# Altium PCB RTTester.PcbDoc (part 1 of 2)
Units mil, origin at the board's own origin, x right, y up, seen from the top; angles counter-clockwise.
Board outline 3930 x 3920 mil, 2 copper layers (Top Layer, Bottom Layer); 146 components, 202 nets, 779 pads, 204 vias.
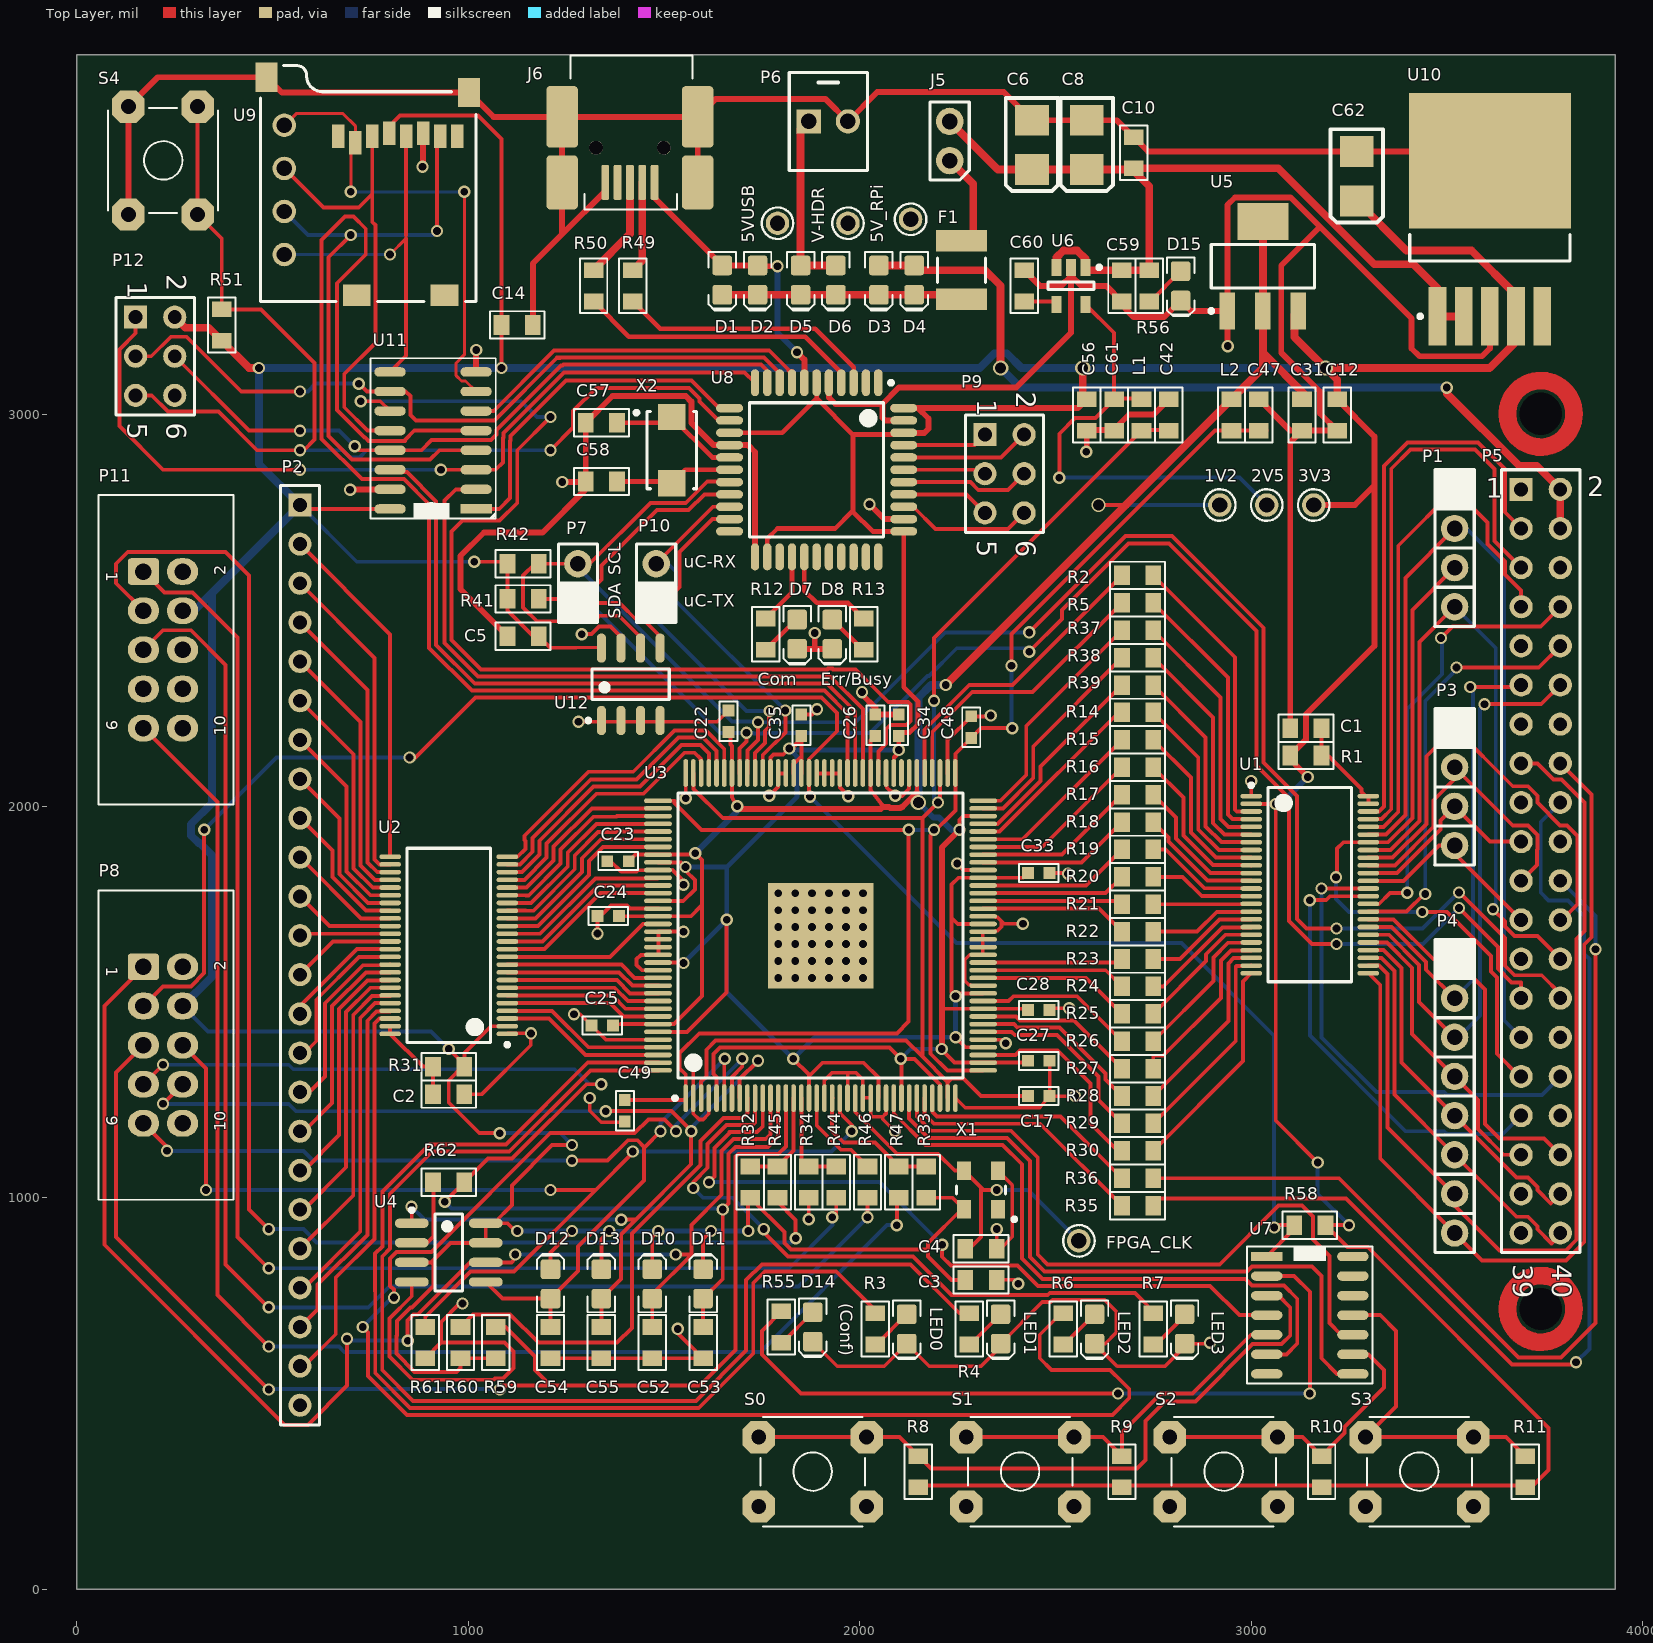
[diagram p0: Top Layer view]
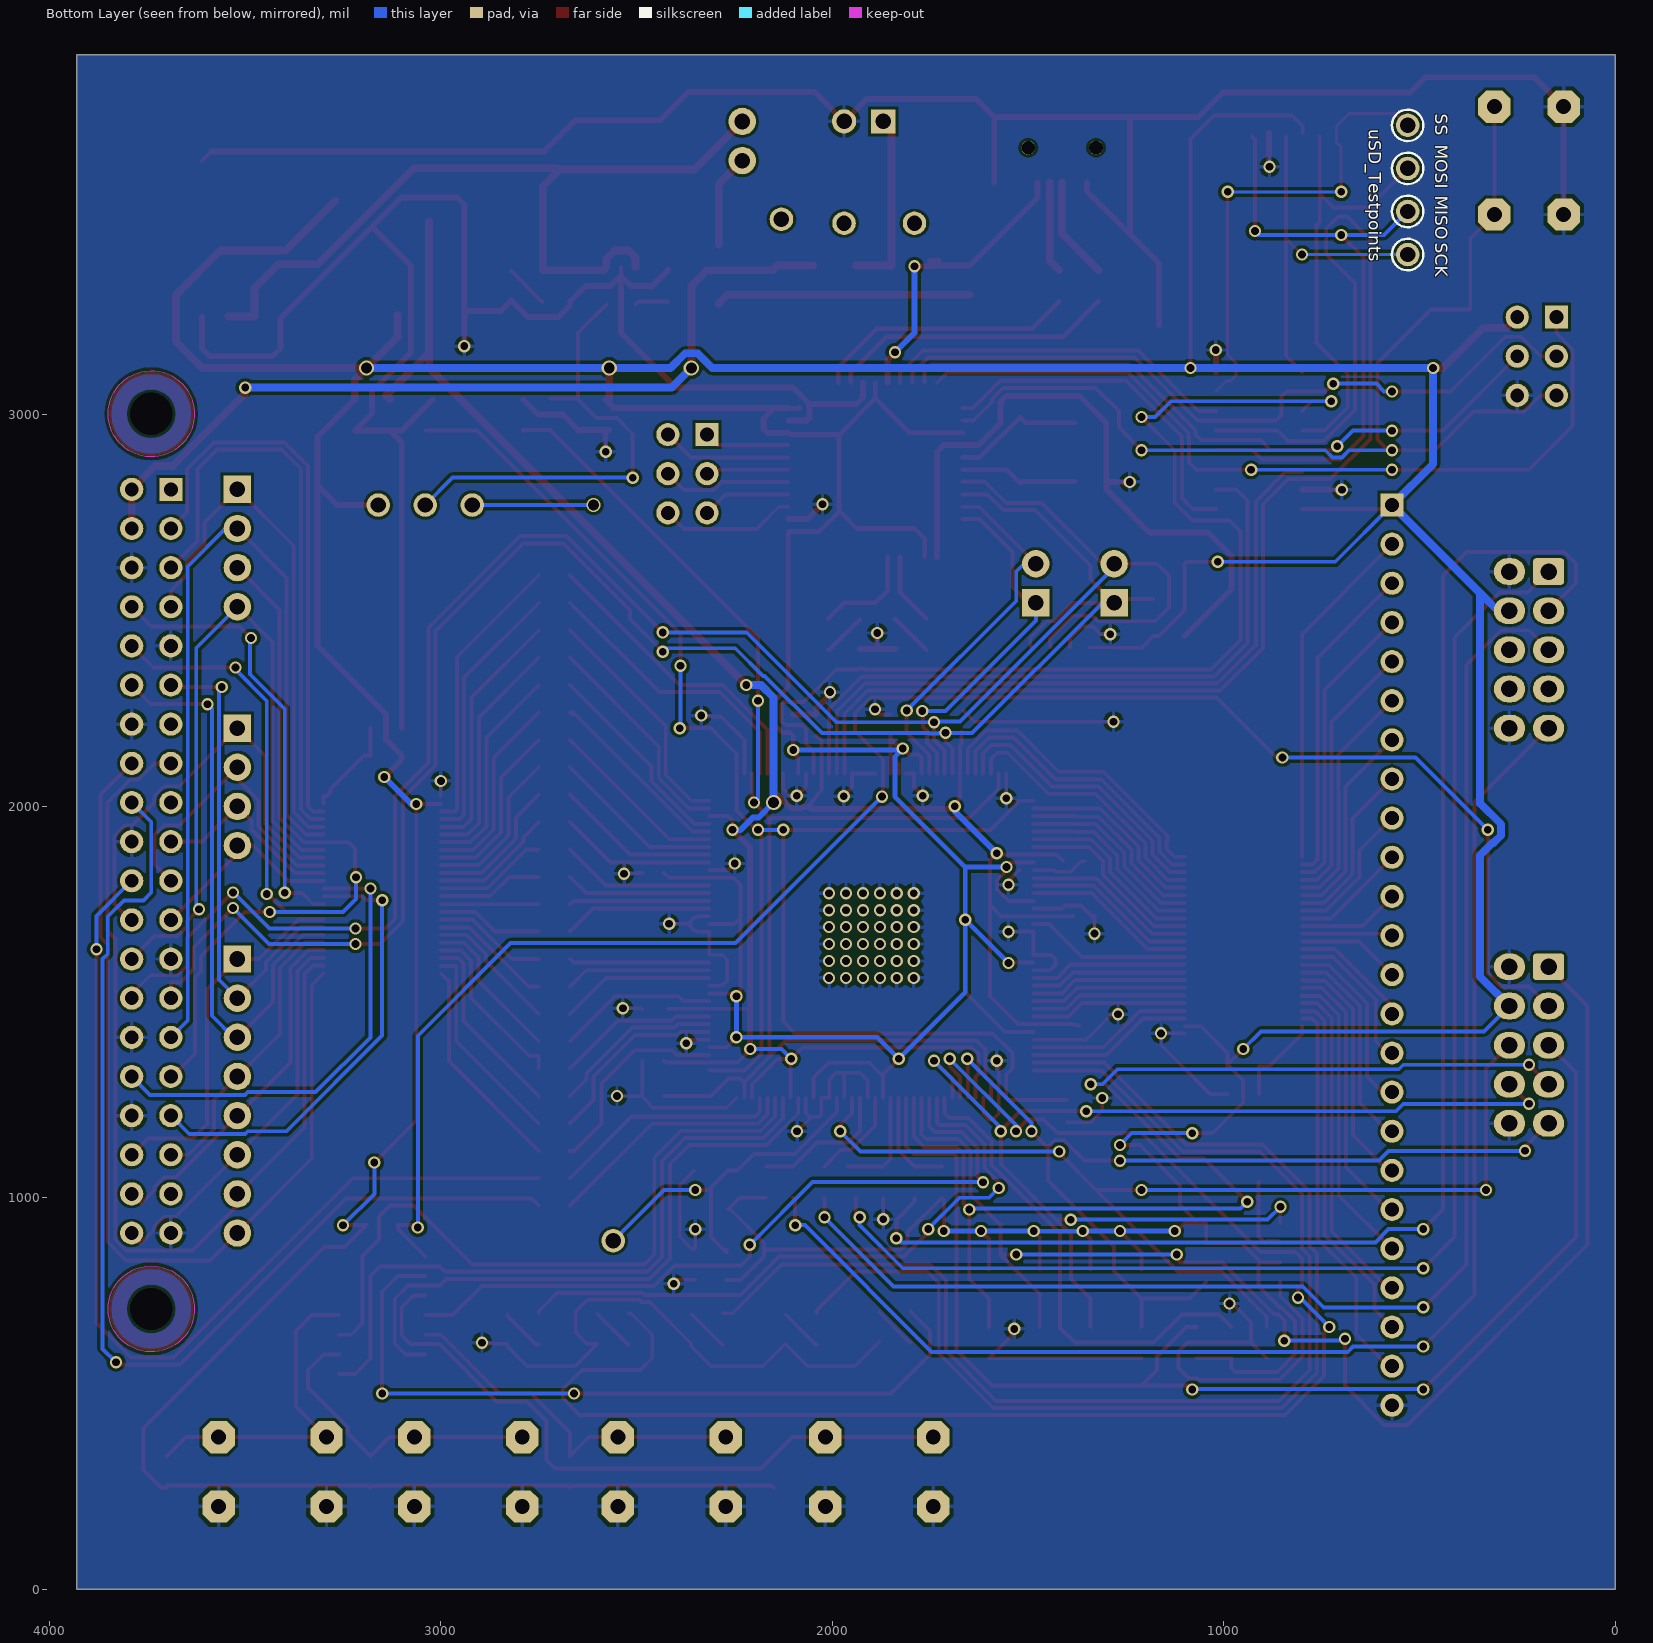
[diagram p1: Bottom Layer view, seen from below]

## Layer stack, top to bottom
Top Solder: solder mask 0.4, Solder Resist, Dk 3.5
Top Layer: signal copper 1.4
Dielectric 1: dielectric 12.6, FR-4, Dk 4.8
Bottom Layer: signal copper 1.4
Bottom Solder: solder mask 0.4, Solder Resist, Dk 3.5

## Board outline
0,0 3930,0 3930,3920 0,3920

## Design rules (kind name [scope] priority, off if disabled: settings)
AssemblyTestpoint [All] p1: testpointundercomponent=FALSE minsize=40 maxsize=100 preferedsize=60 minholesize=0 maxholesize=40 preferedholesize=32 testpointgrid=1 usegrid=FALSE gridtolerance=0.01 allowsidetop=TRUE allowsidebottom=TRUE
Clearance Pad_Clearance [(InPadClass('All Pads'))] p1: gap=7
Clearance [All] p2: gap=8
FabricationTestpoint [All] p1: side=3 testpointundercomponent=FALSE minsize=40 maxsize=100 preferedsize=60 minholesize=0 maxholesize=40 preferedholesize=32 testpointgrid=1 allowsidetop=TRUE allowsidebottom=TRUE usegrid=FALSE gridtolerance=0.01
HoleSize [All] p1: absolutevalues=TRUE maxlimit=150 minlimit=11.81 maxpercent=80.000 minpercent=20.000
PolygonConnect [All] p1: connectstyle=Relief reliefconductorwidth=10 reliefentries=4 polygonreliefangle="90 Angle" airgapwidth=10
RoutingVias [All] p1: holewidth=19.68 width=31.5 viastyle="Through Hole" minholewidth=15.75 minwidth=27.56 maxholewidth=27.56 maxwidth=35.43
SMDNeckDown [All] p1: percent=105.000
SolderMaskExpansion [All] p1: expansion=4
Width [All] p1: maxlimit=4000 minlimit=8 preferedwidth=10
27 further rules are at their usual default settings.

## Classes and differential pairs
net class SW[0..3]: SW0 SW1 SW2 SW3
net class LED[0..3]: LED0 LED1 LED2 LED3
net class FPGAIO_B[0..21]: FPGAIO_B0 FPGAIO_B1 FPGAIO_B2 FPGAIO_B3 FPGAIO_B4 FPGAIO_B5 FPGAIO_B6 FPGAIO_B7 FPGAIO_B8 FPGAIO_B9 FPGAIO_B10 FPGAIO_B11 FPGAIO_B12 FPGAIO_B13 FPGAIO_B14 FPGAIO_B15 FPGAIO_B16 FPGAIO_B17 FPGAIO_B18 FPGAIO_B19 FPGAIO_B20 FPGAIO_B21
net class FPGAIO_A[2..27]: FPGAIO_A2 FPGAIO_A3 FPGAIO_A4 FPGAIO_A5 FPGAIO_A6 FPGAIO_A7 FPGAIO_A8 FPGAIO_A9 FPGAIO_A10 FPGAIO_A11 FPGAIO_A12 FPGAIO_A13 FPGAIO_A14 FPGAIO_A15 FPGAIO_A16 FPGAIO_A17 FPGAIO_A18 FPGAIO_A19 FPGAIO_A20 FPGAIO_A21 FPGAIO_A22 FPGAIO_A23 FPGAIO_A24 FPGAIO_A25
component class U_PUS_Decoupling: C6 C8 C17 C22 C23 C24 C25 C26 C27 C28 C33 C34 C35 C42 C47 C48 C49 L1 L2
component class U_PSU: D1 D2 D3 D4 D5 D6 F1 J5
component class U_PSU_3V3_LD29300: C10 C62 U10
component class U_PSU_2V5_LDK130: C59 C60 C61 U6
component class U_PSU_1V2_LD1117A: C12 C31 U5
component class U_OSC: C3 C4 X1
component class U_MicroSD: U9
component class U_MCU_USB_Interface: C56 C57 C58 D7 D8 P9 P10 P12 R12 R13 R49 R50 R51 S4 U8 X2
component class U_LEDs_Switches: D14 D15 LED0 LED1 LED2 LED3 R3 R4 R6 R7 R8 R9 R10 R11 R55 R56 S0 S1 S2 S3 U7
component class U_FPGA_Conf: R58 R59 R60 R61 R62 U4
component class U_FPGA_Banks: U3
component class U_Connectors: C1 C2 C14 J6 P1 P2 P3 P4 P5 P6 P7 R1 R2 R5 R14 R15 R16 R17 R18 R19 R20 R21 R22 R23 R24 R25 R26 R27 R28 R29 R30 R31 R35 R36 R37 R38 R39 R41 R42 U1 U2 U11
component class U_Config_Interfaces: C52 C53 C54 C55 D10 D11 D12 D13 P8 P11 R32 R33 R34 R44 R45 R46 R47
component class U_EEPROM: C5 U12

## Components (designator, comment, footprint, x,y, rotation, side; value= is the part's Value field where it differs from the comment)
C1 "10pF" 0805C-GENERIC 3170,2200 r180 top
C2 "10pF" 0805C-GENERIC 920,1265 r0 top
C3 "0.1uF" 0805C-GENERIC 2280,790 r0 top
C4 "15pF" 0805C-GENERIC 2280,870 r0 top
C5 "100nF" 0805C-GENERIC 1170,2435 r180 top
C6 "10uF" AVX-CAPC3528_V 2440,3690 r90 top
C8 "10uF" AVX-CAPC3528_V 2580,3690 r90 top
C10 "0.47uF" 0805C-GENERIC 2700,3640 r90 top
C12 "0.1uF" 0805C-GENERIC 3220,3030 r270 top
C14 "100nF" 0805C-GENERIC 1095,3230 r0 top
C17 "10nF" 0603C-GENERIC 2485,1260 r180 top
C22 "4.7nF" 0603C-GENERIC 1665,2190 r90 top
C23 "4.7nF" 0603C-GENERIC 1410,1860 r180 top
C24 "10nF" 0603C-GENERIC 1385,1720 r180 top
C25 "22nF" 0603C-GENERIC 1370,1440 r180 top
C26 "0.1uF" 0603C-GENERIC 2040,2180 r90 top
C27 "0.47uF" 0603C-GENERIC 2430,1350 r0 top
C28 "10uF" 0603C-GENERIC 2430,1480 r0 top
C31 "10uF" 0805C-GENERIC 3130,3030 r270 top
C33 "4.7nF" 0603C-GENERIC 2430,1830 r0 top
C34 "22nF" 0603C-GENERIC 2100,2180 r90 top
C35 "1uF" 0603C-GENERIC 1850.79,2180 r90 top
C42 "10uF" 0805C-GENERIC 2790,3030 r270 top
C47 "10uF" 0805C-GENERIC 3020,3030 r270 top
C48 "2.2nF" 0603C-GENERIC 2285,2175 r90 top
C49 "0.22uF" 0603C-GENERIC 1400,1250 r270 top
C52 "10pF" 0805C-GENERIC 1470,660 r270 top
C53 "10pF" 0805C-GENERIC 1600,660 r270 top
C54 "10pF" 0805C-GENERIC 1210,660 r270 top
C55 "10pF" 0805C-GENERIC 1340,660 r270 top
C56 "1uF" 0805C-GENERIC 2580,2970 r90 top
C57 "12pF" 0805C-GENERIC 1310,2980 r0 top
C58 "12pF" 0805C-GENERIC 1310,2830 r0 top
C59 "1uF" 0805C-GENERIC 2670,3360 r270 top
C60 "10nF" 0805C-GENERIC 2420,3300 r90 top
C61 "1uF" 0805C-GENERIC 2650,3030 r270 top locked
C62 "10uF" AVX-CAPC3528_V 3270,3610 r90 top
D1 "D Schottky" LED-0805-K 1649,3344.5 r270 top
D2 "D Schottky" LED-0805-K 1739,3344.5 r270 top
D3 "D Schottky" LED-0805-K 2049,3344.5 r270 top
D4 "D Schottky" LED-0805-K 2139,3344.5 r270 top
D5 "D Schottky" LED-0805-K 1849,3344.5 r270 top
D6 "D Schottky" LED-0805-K 1939,3344.5 r270 top
D7 "LEDG" LED-0805-K 1840,2440 r270 top
D8 "LEDY" LED-0805-K 1930,2440 r270 top
D10 "D Schottky" LED-0805-K 1470,780 r90 top
D11 "D Schottky" LED-0805-K 1600,780 r90 top
D12 "D Schottky" LED-0805-K 1210,780 r90 top
D13 "D Schottky" LED-0805-K 1340,780 r90 top
D14 "LEDY" LED-0805-K 1880,670 r270 top
D15 "LEDG" LED-0805-K 2820,3330 r270 top
F1 "Polyfuse_1812L200THPR" 1812 2260,3370 r90 top
J5 "JMPR2" JMPR2-CLOSED 2230,3650 r180 top
J6 "USB_Mini-B" USB_Mini-B_Molex_SMT 1218,3919 r270 top
L1 "1K at 100MHz 300mA Bead" 0805FB-1KZ 2720,3030 r270 top
L2 "1K at 100MHz 300mA Bead" 0805FB-1KZ 2950,3030 r270 top locked
LED0 "LEDB" LED-0805-K 2120,665 r270 top
LED1 "LEDB" LED-0805-K 2360,665 r270 top
LED2 "LEDB" LED-0805-K 2600,665 r270 top
LED3 "LEDB" LED-0805-K 2830,665 r270 top
P1 "Header 4" HEADER-1X4 3520,2810 r0 top
P2 "Header 24" HDR1X24 570,2770 r270 top
P3 "Header 4" HEADER-1X4 3520,2200 r0 top
P4 "Header 8" HEADER-1X8 3520,1610 r0 top
P5 "Header 20X2" HDR2X20 3690,2810 r270 top
P6 "Header 2" "Connector Molex 2" 1870,3750 r0 top
P7 "Header 2" HEADER-1X2 1280,2520 r180 top
P8 "Header 5X2" 10P_PCB_HEADER_BRD_MNT 220,1390 r0 top
P9 "Header 3X2" HDR2X3 2320,2950 r270 top
P10 "Header 2" HEADER-1X2 1480,2520 r180 top
P11 "Header 5X2" 10P_PCB_HEADER_BRD_MNT 220,2400 r0 top
P12 "Header 3X2" HDR2X3 150,3250 r270 top locked
R1 "200k" 0805R-220K 3170,2130 r180 top
R2 "270" 0805R-270 2680,2590 r0 top
R3 "270" 0805R-270 2040,635 r90 top
R4 "270" 0805R-270 2280,635 r90 top
R5 "270" 0805R-270 2680,2520 r0 top
R6 "270" 0805R-270 2520,635 r90 top
R7 "270" 0805R-270 2750,635 r90 top
R8 "10k" 0805R-10K 2150,340 r270 top
R9 "10k" 0805R-10K 2670,340 r270 top
R10 "10k" 0805R-10K 3180,340 r270 top
R11 "10k" 0805R-10K 3700,340 r270 top
R12 "270" 0805R-270 1760,2410 r90 top
R13 "270" 0805R-270 2010,2410 r90 top
R14 "270" 0805R-270 2680,2240 r0 top
R15 "270" 0805R-270 2680,2170 r0 top
R16 "270" 0805R-270 2680,2100 r0 top
R17 "270" 0805R-270 2680,2030 r0 top
R18 "270" 0805R-270 2680,1960 r0 top
R19 "270" 0805R-270 2680,1890 r0 top
R20 "270" 0805R-270 2680,1820 r0 top
R21 "270" 0805R-270 2680,1750 r0 top
R22 "270" 0805R-270 2680,1680 r0 top
R23 "270" 0805R-270 2680,1610 r0 top
R24 "270" 0805R-270 2680,1540 r0 top
R25 "270" 0805R-270 2680,1470 r0 top
R26 "270" 0805R-270 2680,1400 r0 top
R27 "270" 0805R-270 2680,1330 r0 top
R28 "270" 0805R-270 2680,1260 r0 top
R29 "270" 0805R-270 2680,1190 r0 top
R30 "270" 0805R-270 2680,1120 r0 top
R31 "200k" 0805R-220K 920,1335 r0 top
R32 "10k" 0805R-10K 1720,1000 r90 top
R33 "10k" 0805R-10K 2170,1000 r90 top
R34 "1k" 0805R-1K 1870,1070 r270 top
R35 "270" 0805R-270 2680,980 r0 top
R36 "270" 0805R-270 2680,1050 r0 top
R37 "270" 0805R-270 2680,2450 r0 top
R38 "270" 0805R-270 2680,2380 r0 top
R39 "270" 0805R-270 2680,2310 r0 top
R41 "2.2k" 0805R-0R1 1110,2530 r0 top
R42 "2.2k" 0805R-0R1 1110,2620 r0 top
R44 "100" 0805R-100 1940,1070 r270 top
R45 "100" 0805R-100 1790,1070 r270 top
R46 "100" 0805R-100 2020,1070 r270 top
R47 "100" 0805R-100 2100,1070 r270 top
R49 "22" 0805R-22 1420,3360 r270 top
R50 "22" 0805R-22 1320,3360 r270 top
R51 "10k" 0805R-10K 370,3270 r270 top
R55 "270" 0805R-270 1800,640 r90 top
R56 "270" 0805R-270 2740,3300 r90 top
R58 "10k" 0805R-10K 3190,930 r180 top
R59 "10k" 0805R-10K 1070,590 r90 top
R60 "10k" 0805R-10K 980,590 r90 top locked
R61 "10k" 0805R-10K 890,670 r270 top
R62 "25" 0805R-0R1 920,1040 r0 top
S0 "EVQ-PQHB55" TACT-SWITCH-TS1150 1880,300 r0 top
S1 "EVQ-PQHB55" TACT-SWITCH-TS1150 2410,300 r0 top
S2 "EVQ-PQHB55" TACT-SWITCH-TS1150 2930,300 r0 top
S3 "EVQ-PQHB55" TACT-SWITCH-TS1150 3430,300 r0 top
S4 "EVQ-PQHB55" TACT-SWITCH-TS1150 220,3650 r270 top
U1 "GTL2000" TSSOP50P810X120-48N 3150,1800 r0 top
U2 "GTL2000" TSSOP50P810X120-48N 950,1645 r180 top
U3 "EP4CE15E22C8N" EQFP144_A-165_D2-67_N 1900,1670 r90 top
U4 "EPCS16SI8N" SOIC8_N 950,860 r0 top
U5 "LD1117AS12TR" SOT-223_N 3030,3380 r90 top
U6 "LDK130M25R" SOT23-5L_N 2540,3330 r270 top
U7 "74HC7014" SO14 3040,850 r0 top
U8 "ATmega32U4-AU" 44ML_N 1890,2860 r270 top
U9 "microSD Socket" MICRO-SD-SOCKET-PP 1020,3290 r0 top
U10 "LD29300P2M33R" P2PAK/A_N 3610,3500 r90 top
U11 "ADG3257BRQ" SO16 1020,2760 r180 top
U12 "24LC256-I/SN" SOIC-SN8_L 1415,2312 r90 top
X1 "VCC1-B3B-50M0000000" HOSC-L500HW320H105-4_2 2310,1020 r90 top
X2 "4SMX" 4SMX 1520,2910 r270 top (schematic designator Y1)

## Footprints (in the part's own frame and the unit in brackets; to place one, negate y for a bottom-side part, rotate by r counter-clockwise, add the part's x,y. Pads: shape width x height; smd on the part's side, far side on the other; paste and mask are expansions set on the pad)
4SMX [mm] "Surface Mount Quartz Crystal; Body 5.2 x 3.4 mm (LxW max)"
  rect 1.7x1.8 smd: 1(-2.15,0) 2(2.15,0)
  silkscreen extent -2.57,-2.42 2.5,1.6
10P_PCB_HEADER_BRD_MNT [mil] "HEADER BRD MNT 10POS 2.54MM"
  round 40 on Mech15: 0(0,0)
  rrect25% 80x68 hole 42: 1(-50,200)
  oval 80x68 hole 42: 2(50,200) 3(-50,100) 4(50,100) 5(-50,0) 6(50,0) 7(-50,-100) 8(50,-100) 9(-50,-200) 10(50,-200)
  silkscreen extent -165,-395 180,395, body extent -162,-394 178,394, height 390
44ML_N [mm] "Thin QFP, 44-Leads, Body 10x10mm, Pitch 0.8mm, IPC Medium Density"
  oval 1.75x0.55 smd: 1(-5.65,4) 2(-5.65,3.2) 3(-5.65,2.4) 4(-5.65,1.6) 5(-5.65,0.8) 6(-5.65,0) 7(-5.65,-0.8) 8(-5.65,-1.6) 9(-5.65,-2.4) 10(-5.65,-3.2) 11(-5.65,-4) 23(5.65,-4) 24(5.65,-3.2) 25(5.65,-2.4) 26(5.65,-1.6) 27(5.65,-0.8) 28(5.65,0) 29(5.65,0.8) 30(5.65,1.6) 31(5.65,2.4) 32(5.65,3.2) 33(5.65,4)
  oval 0.55x1.75 smd: 12(-4,-5.65) 13(-3.2,-5.65) 14(-2.4,-5.65) 15(-1.6,-5.65) 16(-0.8,-5.65) 17(0,-5.65) 18(0.8,-5.65) 19(1.6,-5.65) 20(2.4,-5.65) 21(3.2,-5.65) 22(4,-5.65) 34(4,5.65) 35(3.2,5.65) 36(2.4,5.65) 37(1.6,5.65) 38(0.8,5.65) 39(0,5.65) 40(-0.8,5.65) 41(-1.6,5.65) 42(-2.4,5.65) 43(-3.2,5.65) 44(-4,5.65)
  silkscreen extent -5.77,-4.35 4.35,4.95, body extent -5,-5 5,5, height 1.2
0603C-GENERIC [mil] "CAPACITOR 0603"
  rect 30x30 smd: 1(0,0) 2(55,0)
  silkscreen extent -23,-23 78,23, body extent -4,-15 59,15, height 19
0805C-GENERIC [mil] "CAPACITOR 0805"
  rect 40x50 smd: 1(-10,0) 2(70,0)
  silkscreen extent -40,-35 100,35, body extent -11,-25 70,25, height 26
0805FB-1KZ [mil] "FERRITE BEAD 0805"
  rect 40x50 smd: 1(-10,0) 2(70,0)
  silkscreen extent -40,-35 100,35, body extent -11,-25 70,25, height 26
0805R-0R1 [mil] "RESISTOR 0805"
  rect 40x50 smd: 1(-10,0) 2(70,0)
  silkscreen extent -40,-35 100,35, body extent -11,-25 70,25, height 27
0805R-1K [mil] "RESISTOR 0805"
  rect 40x50 smd: 1(-10,0) 2(70,0)
  silkscreen extent -40,-35 100,35, body extent -11,-25 70,25, height 27
0805R-10K [mil] "RESISTOR 0805"
  rect 40x50 smd: 1(0,0) 2(80,0)
  silkscreen extent -30,-35 110,35, body extent -1,-25 80,25, height 27
0805R-22 [mil] "RESISTOR 0805"
  rect 40x50 smd: 1(-10,0) 2(70,0)
  silkscreen extent -40,-35 100,35, body extent -11,-25 70,25, height 27
0805R-100 [mil] "RESISTOR 0805"
  rect 40x50 smd: 1(-10,0) 2(70,0)
  silkscreen extent -40,-35 100,35, body extent -11,-25 70,25, height 27
0805R-220K [mil] "RESISTOR 0805"
  rect 40x50 smd: 1(-10,0) 2(70,0)
  silkscreen extent -40,-35 100,35, body extent -11,-25 70,25, height 27
0805R-270 [mil] "RESISTOR 0805"
  rect 40x50 smd: 1(-10,0) 2(70,0)
  silkscreen extent -40,-35 100,35, body extent -11,-25 70,25, height 27
1812 [mm] "Chip Capacitor, Body 4.5x3.2mm, IPC High Density"
  rect 1.4x3.3 smd: 1(-1.9,0) 2(1.9,0)
  silkscreen extent -0.8,-1.55 0.8,1.55, body extent -2.4,-1.7 2.4,1.7, height 1.4
AVX-CAPC3528_V [mm]
  rect 2x2.2 smd: 1(-1.6,0) 2(1.6,0)
  silkscreen extent -3,-1.7 3.05,1.7, body extent -1.79,-1.54 1.8,1.54, height 1.9
"Connector Molex 2" [mil]
  rect 62x62 hole 39.4: 1(0,0)
  round 62 hole 39.4: 2(100,0)
  silkscreen extent -50,-125 150,125
EQFP144_A-165_D2-67_N [mm] "Shrink QFP, 144-Leads, Body 20x20mm, Pitch 0.5mm, Thermal Pad 6.85x6.85mm, IPC Medium Density"
  oval 1.8x0.3 smd: 1(-10.55,8.75) 2(-10.55,8.25) 3(-10.55,7.75) 4(-10.55,7.25) 5(-10.55,6.75) 6(-10.55,6.25) 7(-10.55,5.75) 8(-10.55,5.25) 9(-10.55,4.75) 10(-10.55,4.25) 11(-10.55,3.75) 12(-10.55,3.25) 13(-10.55,2.75) 14(-10.55,2.25) 15(-10.55,1.75) 16(-10.55,1.25) 17(-10.55,0.75) 18(-10.55,0.25) 19(-10.55,-0.25) 20(-10.55,-0.75) 21(-10.55,-1.25) 22(-10.55,-1.75) 23(-10.55,-2.25) 24(-10.55,-2.75) 25(-10.55,-3.25) 26(-10.55,-3.75) 27(-10.55,-4.25) 28(-10.55,-4.75) 29(-10.55,-5.25) 30(-10.55,-5.75) 31(-10.55,-6.25) 32(-10.55,-6.75) 33(-10.55,-7.25) 34(-10.55,-7.75) 35(-10.55,-8.25) 36(-10.55,-8.75) 73(10.55,-8.75) 74(10.55,-8.25) 75(10.55,-7.75) 76(10.55,-7.25) 77(10.55,-6.75) 78(10.55,-6.25) 79(10.55,-5.75) 80(10.55,-5.25) 81(10.55,-4.75) 82(10.55,-4.25) 83(10.55,-3.75) 84(10.55,-3.25) 85(10.55,-2.75) 86(10.55,-2.25) 87(10.55,-1.75) 88(10.55,-1.25) 89(10.55,-0.75) 90(10.55,-0.25) 91(10.55,0.25) 92(10.55,0.75) 93(10.55,1.25) 94(10.55,1.75) 95(10.55,2.25) 96(10.55,2.75) 97(10.55,3.25) 98(10.55,3.75) 99(10.55,4.25) 100(10.55,4.75) 101(10.55,5.25) 102(10.55,5.75) 103(10.55,6.25) 104(10.55,6.75) 105(10.55,7.25) 106(10.55,7.75) 107(10.55,8.25) 108(10.55,8.75)
  oval 0.3x1.8 smd: 37(-8.75,-10.55) 38(-8.25,-10.55) 39(-7.75,-10.55) 40(-7.25,-10.55) 41(-6.75,-10.55) 42(-6.25,-10.55) 43(-5.75,-10.55) 44(-5.25,-10.55) 45(-4.75,-10.55) 46(-4.25,-10.55) 47(-3.75,-10.55) 48(-3.25,-10.55) 49(-2.75,-10.55) 50(-2.25,-10.55) 51(-1.75,-10.55) 52(-1.25,-10.55) 53(-0.75,-10.55) 54(-0.25,-10.55) 55(0.25,-10.55) 56(0.75,-10.55) 57(1.25,-10.55) 58(1.75,-10.55) 59(2.25,-10.55) 60(2.75,-10.55) 61(3.25,-10.55) 62(3.75,-10.55) 63(4.25,-10.55) 64(4.75,-10.55) 65(5.25,-10.55) 66(5.75,-10.55) 67(6.25,-10.55) 68(6.75,-10.55) 69(7.25,-10.55) 70(7.75,-10.55) 71(8.25,-10.55) 72(8.75,-10.55) 109(8.75,10.55) 110(8.25,10.55) 111(7.75,10.55) 112(7.25,10.55) 113(6.75,10.55) 114(6.25,10.55) 115(5.75,10.55) 116(5.25,10.55) 117(4.75,10.55) 118(4.25,10.55) 119(3.75,10.55) 120(3.25,10.55) 121(2.75,10.55) 122(2.25,10.55) 123(1.75,10.55) 124(1.25,10.55) 125(0.75,10.55) 126(0.25,10.55) 127(-0.25,10.55) 128(-0.75,10.55) 129(-1.25,10.55) 130(-1.75,10.55) 131(-2.25,10.55) 132(-2.75,10.55) 133(-3.25,10.55) 134(-3.75,10.55) 135(-4.25,10.55) 136(-4.75,10.55) 137(-5.25,10.55) 138(-5.75,10.55) 139(-6.25,10.55) 140(-6.75,10.55) 141(-7.25,10.55) 142(-7.75,10.55) 143(-8.25,10.55) 144(-8.75,10.55)
  rect 6.85x6.85 smd: 145(0,0)
  silkscreen extent -10.67,-9.25 9.25,9.57, body extent -10,-10 10,10, height 1.65
HDR1X24 [mm] "Connector; Header; 24 Position"
  rect 1.5x1.5 hole 0.9: 1(0,0)
  round 1.5 hole 0.9: 2(2.54,0) 3(5.08,0) 4(7.62,0) 5(10.16,0) 6(12.7,0) 7(15.24,0) 8(17.78,0) 9(20.32,0) 10(22.86,0) 11(25.4,0) 12(27.94,0) 13(30.48,0) 14(33.02,0) 15(35.56,0) 16(38.1,0) 17(40.64,0) 18(43.18,0) 19(45.72,0) 20(48.26,0) 21(50.8,0) 22(53.34,0) 23(55.88,0) 24(58.42,0)
  silkscreen extent -1.27,-1.27 59.69,1.27
HDR2X3 [mm] "Connector; Header; 3x2 Position"
  rect 1.5x1.5 hole 0.9: 1(0,0)
  round 1.5 hole 0.9: 2(0,2.54) 3(2.54,0) 4(2.54,2.54) 5(5.08,0) 6(5.08,2.54)
  silkscreen extent -1.27,-1.27 6.35,3.81
HDR2X20 [mm] "Connector; Header; 20x2 Position"
  rect 1.5x1.5 hole 0.9: 1(0,0)
  round 1.5 hole 0.9: 2(0,2.54) 3(2.54,0) 4(2.54,2.54) 5(5.08,0) 6(5.08,2.54) 7(7.62,0) 8(7.62,2.54) 9(10.16,0) 10(10.16,2.54) 11(12.7,0) 12(12.7,2.54) 13(15.24,0) 14(15.24,2.54) 15(17.78,0) 16(17.78,2.54) 17(20.32,0) 18(20.32,2.54) 19(22.86,0) 20(22.86,2.54) 21(25.4,0) 22(25.4,2.54) 23(27.94,0) 24(27.94,2.54) 25(30.48,0) 26(30.48,2.54) 27(33.02,0) 28(33.02,2.54) 29(35.56,0) 30(35.56,2.54) 31(38.1,0) 32(38.1,2.54) 33(40.64,0) 34(40.64,2.54) 35(43.18,0) 36(43.18,2.54) 37(45.72,0) 38(45.72,2.54) 39(48.26,0) 40(48.26,2.54)
  silkscreen extent -1.27,-1.27 49.53,3.81
HEADER-1X2 [mil]
  rect 70x70 hole 40: 1(0,0)
  round 70 hole 40: 2(0,-100)
  silkscreen extent -50,-150 50,50, body extent -50,-150 50,50, height 470
HEADER-1X4 [mil]
  rect 70x70 hole 40: 1(0,0)
  round 70 hole 40: 2(0,-100) 3(0,-200) 4(0,-300)
  silkscreen extent -51,-350 50,50, body extent -50,-350 50,50, height 470
HEADER-1X8 [mil]
  rect 70x70 hole 40: 1(0,0)
  round 70 hole 40: 2(0,-100) 3(0,-200) 4(0,-300) 5(0,-400) 6(0,-500) 7(0,-600) 8(0,-700)
  silkscreen extent -50,-750 50,50, body extent -50,-750 50,50, height 470
HOSC-L500HW320H105-4_2 [mm]
  rect 1.2x0.9 smd: 1(-1.25,-1.1) 2(1.25,-1.1) 3(1.25,1.1) 4(-1.25,1.1)
  silkscreen extent -2.03,-2.28 0.25,1.6, body extent -2.5,-1.6 2.5,1.6, height 1.05
JMPR2-CLOSED [mil]
  round 70 hole 40: 1(0,0) 2(0,-100)
  silkscreen extent -50,-150 50,50, body extent -50,-152 50,50, height 300
LED-0805-K [mil]
  round 20 on Mech15: 0(0,0)
  rrect25% 50x50 smd: A(-37.5,0) K(37.5,0)
  Top Layer pour cut-out: -15,30 15,30 15,-30 -15,-30
  silkscreen extent -73,-35 77,35, body extent -39,-25 39,25, height 31
MICRO-SD-SOCKET-PP [mil]
  rect 32x60 smd: 1(-351.97,422) 2(-308.66,406) 3(-265.35,422) 4(-222.05,430) 5(-178.74,422) 6(-135.43,430) 7(-92.13,422) 8(-48.82,422)
  rect 71x56 smd: CD1(-80.71,16) CD2(-305.12,16)
  rect 56x75 smd: GND1(-535.43,573) GND3(-17.72,534)
  silkscreen extent -551,0 0,603
P2PAK/A_N [mm] "D2-PAK, 6-Leads, Body 9.2x10.2mm, Pitch 1.7mm, Lead Span 15.4mm, IPC Medium Density"
  rect 3.8x1.15 smd: 1(-6.3,3.4) 2(-6.3,1.7) 3(-6.3,0) 4(-6.3,-1.7) 5(-6.3,-3.4)
  rect 8.8x10.5 smd: 6(3.8,0)
  silkscreen extent -6.42,-5.2 -1,5.2, body extent -2.7,-5.2 6.65,5.2, height 4.8
SO14 [mil]
  rect 80x24 smd: 1(0,0)
  oval 80x24 smd: 2(0,-50) 3(0,-100) 4(0,-150) 5(0,-200) 6(0,-250) 7(0,-300) 8(220,-300) 9(220,-250) 10(220,-200) 11(220,-150) 12(220,-100) 13(220,-50) 14(220,0)
  silkscreen extent -50,-325 270,26, body extent -20,-325 240,25, height 61
SO16 [mil]
  rect 80x24 smd: 1(0,0)
  oval 80x24 smd: 2(0,-50) 3(0,-100) 4(0,-150) 5(0,-200) 6(0,-250) 7(0,-300) 8(0,-350) 9(220,-350) 10(220,-300) 11(220,-250) 12(220,-200) 13(220,-150) 14(220,-100) 15(220,-50) 16(220,0)
  silkscreen extent -50,-385 270,25, body extent -20,-385 240,25, height 61
SOIC8_N [mm] "SOIC, 8-Leads, Body 4.9x3.9mm, Pitch 1.27mm, IPC Medium Density"
  oval 2.2x0.6 smd: 1(-2.4,1.905) 2(-2.4,0.635) 3(-2.4,-0.635) 4(-2.4,-1.905) 5(2.4,-1.905) 6(2.4,-0.635) 7(2.4,0.635) 8(2.4,1.905)
  silkscreen extent -2.52,-2.5 0.9,2.88, body extent -2,-2.5 2,2.5, height 1.75
SOIC-SN8_L [mm] "SOIC, 8-Leads, Body 4.9x3.8mm, Pitch 1.27mm, IPC High Density"
  oval 1.9x0.6 smd: 1(-2.35,1.905) 2(-2.35,0.635) 3(-2.35,-0.635) 4(-2.35,-1.905) 5(2.35,-1.905) 6(2.35,-0.635) 7(2.35,0.635) 8(2.35,1.905)
  silkscreen extent -2.47,-2.5 1,2.88, body extent -2,-2.5 2,2.5, height 1.75
SOT23-5L_N [mm] "SOT23, 5-Leads, Body 2.9x1.6mm, Pitch 0.95mm, Lead Span 2.8mm, IPC Medium Density"
  rect 1.1x0.65 smd: 1(-1.2,0.95) 2(-1.2,0) 3(-1.2,-0.95) 4(1.2,-0.95) 5(1.2,0.95)
  silkscreen extent -1.32,-1.5 0.25,1.95, body extent -0.87,-1.5 0.87,1.5, height 1.45
SOT-223_N [mm] "SOT223, 4-Leads, Body 6.5x3.5mm, Pitch 2.3mm, Lead Span 7mm, IPC Medium Density"
  rect 2.4x1 smd: 1(-2.9,2.3) 2(-2.9,0) 3(-2.9,-2.3)
  rect 2.4x3.3 smd: 4(2.9,0)
  silkscreen extent -3.02,-3.35 1.4,3.47, body extent -1.85,-3.35 1.85,3.35, height 1.8
TACT-SWITCH-TS1150 [mm] "Bondtact sealed TH tact switch"
  round 0.508 on Mech15: 0(0,0)
  oct 2.1x2.1 hole 0.965: 1(-3.5,-2.25) 1(3.5,-2.25) 2(-3.5,2.25) 2(3.5,2.25)
  silkscreen extent -3.4,-3.56 3.4,3.56, body extent -4.13,-3.25 4.13,3.25, height 5
TSSOP50P810X120-48N [mm] "TSSOP, 48-Leads, Body 12.50x6.10mm, Pitch 0.50mm, IPC Medium Density"
  oval 1.4x0.3 smd: 1(-3.8,5.75) 2(-3.8,5.25) 3(-3.8,4.75) 4(-3.8,4.25) 5(-3.8,3.75) 6(-3.8,3.25) 7(-3.8,2.75) 8(-3.8,2.25) 9(-3.8,1.75) 10(-3.8,1.25) 11(-3.8,0.75) 12(-3.8,0.25) 13(-3.8,-0.25) 14(-3.8,-0.75) 15(-3.8,-1.25) 16(-3.8,-1.75) 17(-3.8,-2.25) 18(-3.8,-2.75) 19(-3.8,-3.25) 20(-3.8,-3.75) 21(-3.8,-4.25) 22(-3.8,-4.75) 23(-3.8,-5.25) 24(-3.8,-5.75) 25(3.8,-5.75) 26(3.8,-5.25) 27(3.8,-4.75) 28(3.8,-4.25) 29(3.8,-3.75) 30(3.8,-3.25) 31(3.8,-2.75) 32(3.8,-2.25) 33(3.8,-1.75) 34(3.8,-1.25) 35(3.8,-0.75) 36(3.8,-0.25) 37(3.8,0.25) 38(3.8,0.75) 39(3.8,1.25) 40(3.8,1.75) 41(3.8,2.25) 42(3.8,2.75) 43(3.8,3.25) 44(3.8,3.75) 45(3.8,4.25) 46(3.8,4.75) 47(3.8,5.25) 48(3.8,5.75)
  silkscreen extent -3.92,-6.3 2.7,6.57, body extent -3.1,-6.3 3.1,6.3, height 1.2
USB_Mini-B_Molex_SMT [mm]
  rrect25% 2.25x0.5 smd: 1(8.25,6.55) 2(8.25,5.75) 3(8.25,4.95) 4(8.25,4.15) 5(8.25,3.35)
  round 0.9 hole 0.9 unplated: H1(6,7.15) H2(6,2.75)
  rrect25% 4x2.05 smd: MH1(4,0.55) MH4(4,9.35)
  rrect25% 3.5x2.05 smd: MH2(8.25,0.55) MH3(8.25,9.35)
  silkscreen extent 0,1.1 10,9, body extent 0,1.1 9,9, height 3.95

## Part data
C1 C2 C3 C4 C5 C10 C14 C31 C52 C53 C54 C55 C56 C57 C58 C59 C60 C61: library part D-101-0027, "Capacitor, Ceramic, 10% 10V 0805 X7R"
C6 C8: library part CMP-0279-00001-1, "Capacitor, Tantalum, 10uF 10% 20V MCCT-B (3528)"
C12: library part D-101-0027, "Capacitor, Ceramic, 10% 10V 0603 X7R"
C17 C22 C23 C33: library part "CAP 470nF 10V ±10% 0402 (1005 Metric) Thickness 0.6mm SMD", "Capacitor, Ceramic, 10% 10V 0603 X7R"
C24 C25 C26 C27 C34 C35 C48 C49: library part "CAP 4.7uF 10V ±10% 0603 (1608 Metric) Thickness 0.55mm SMD", "Capacitor, Ceramic, 10% 10V 0603 X7R"
C28: library part "CAP 4.7uF 10V ±10% 0603 (1608 Metric) Thickness 0.55mm SMD", "Capacitor, Ceramic, 10% 10V 0805 X7R"
C42 C47: library part "CAP 470nF 10V ±10% 0402 (1005 Metric) Thickness 0.6mm SMD", "Capacitor, Ceramic, 10% 10V 0805 X7R"
C62: library part CMP-0279-00001-1, "Capacitor, Tantalum, 10uF 10% 20V MCCT-B (3528) - TAJB106K020RNJ"
D1 D2 D3 D4 D5 D6 D10 D11 D12 D13: "Schottky Diode - SD0805S020S1R0"
D7 D8 D14 D15 LED0 LED1 LED2 LED3: library part LED2, "Typical RED, GREEN, YELLOW, AMBER GaAs LED"
F1: library part "Fuse 2", "Polyfuse"
J5: library part JMPR2-CLOSED, "JMPR2 CLOSED BY DEFAULT"
J6: "Connector SMD USB Type Mini-B"
L1 L2: library part D-102-0026, "Inductor, Ferrite Bead 1K@100MHz 300mA 0402 BK1005HS102-T"
P1 P3: "Header, 4-Pin"
P2: "Header, 24-Pin"
P4: "Header, 8-Pin"
P5: "Header, 20-Pin, Dual row"
P6 P7 P10: "Header, 2-Pin"
P8 P11: "Header, 5-Pin, Dual row"
P9 P12: "Header, 3-Pin, Dual row"
R1 R2 R3 R4 R5 R6 R7 R8 R9 R10 R11 R12 R13 R14 R15 R16 R17 R18 R19 R20 R21 R22 R23 R24 R25 R26 R27 R28 R29 R30 R31 R32 R33 R34 R35 R36 R37 R38 R39 R41 R42 R44 R45 R46 R47 R49 R50 R51 R55 R56 R58 R59 R60 R61 R62: library part D-100-0116
S0 S1 S2 S3 S4: library part SW_EVQ-PQHB55, "Low-profile captive tact switch"
U1 U2: "22-bit bi-directional low voltage translator"
U3: "Cyclone IV Family FPGA, 1.2V Core, 81 I/O Pins, 4 PLLs, 144-Pin QFP, Speed Grade 8, Commercial Grade, Pb-Free"
U4: "EPCS16 Series, In-system programmable 3.3V serial configuration device, 8-Pin SOIC, 16-Megabit, Industrial Grade, Pb-Free"
U5: "1A, Low Drop Positive Voltage Regulator, 1.2V, 4-Pin SOT-223, Tape and Reel"
U6: library part LD2985BM25R, "300mA, Very-Low Drop and Low Noise Voltage Regulator Low ESR Capacitors Compatible, with Inhibit Function, 2.5V, 5-Pin SOT23-5L"
U7: "IC, Hex Schmitttrigger Buffer, SO-14"
U8: "8-bit AVR Microcontroller, 2.7-5.5V, 16MHz, 32KB Flash, 1KB EEPROM, 2.5KB SRAM, USB Controller, 44-pin TQFP, Industrial Grade (-40°C to 85°C), Ext Osc"
U9: library part USD-SOCKETNEW, "microSD Socket, Push-push type. Schematic element and footprint production proven. Spark Fun Electronics SKU : PRT-00127. tDoc lines correctly indicate media card edge positions when inserting (unlocked, locked, depressed). NOTE: CD1 and CD2 are connected internally"
U10: "3A, Very Low-Drop Voltage Regulators, 3.3V, 6-Pin P2PAK/A"
U11: "933 Mbps, High Speed, 3.3 V / 5 V Quad 2:1 Mux / Demux (4-Bit, 1 of 2) Bus Switch, 100 ps Prop Delay, -40 to 85 degC, 16-pin SOP (RQ-16), Tube"
U12: "256Kbit, 400kHz, 2.5V, I2C Serial EEPROM, 8-Pin SOIC 150mil, Industrial Temperature"
X1: library part OSC-4, "50 MHz Oscillator, 3.3V, 15pF"
X2: "Surface Mount Quartz Crystal"

## Free pads (board coordinates)
  round 60 hole 39.37 mask+0: 0(530,3410) 0(530,3520) 0(530,3630) 0(530,3740) 0(1790,3490) 0(1970,3490) 0(2130,3500) 0(2560,890) 0(2920,2770) 0(3040,2770) 0(3160,2770)
  round 60 hole 108.27 mask+67.91: 0(3740,716) 1(3740,3003)

## Via types
v1: diameter 31.5, hole 19.68, Top Layer to Bottom Layer, tented both sides, 163 vias
v2: diameter 31.5, hole 19.68, Top Layer to Bottom Layer, 36 vias
v3: diameter 39.37, hole 27.56, Top Layer to Bottom Layer, tented both sides, 4 vias
v4: diameter 35.43, hole 27.56, Top Layer to Bottom Layer, tented both sides, 1 vias

## Nets (pads, with @x,y where several pads share a name; then routed paths per layer and width w, separated by ;. In a path a pad name is that pad's centre, name@x,y a point inside that pad or via, vN(x,y) a via of type N, cw(c..) or ccw(c..) an arc to the next point about the centre after c; other vN are vias at no path point)
1V2: C22.1 C23.1 C24.1 C25.1 C26.1 C27.1 C28.1 C31.1 L2.1 pad.0@2920,2770 U3.5 U3.29 U3.34 U3.38 U3.45 U3.70 U3.78 U3.84 U3.102 U3.116 U3.124 U3.138 U5.2 U5.4 | length 6777.8
  Top Layer w10: C25.1@1370,1440 1389.62,1443.62 1525.25,1443.62 1596.75,1515.12 1596.75,1863.25 v1(1580,1880) 1576.69,1876.69 1426.69,1876.69 C23.1@1410,1860 ; C24.1@1385,1720 1385.79,1719.21 1569.21,1719.21 1595,1745 ; U3.5@1634.25,1255.63 1634.25,1308.63 1626.25,1316.63 1626.25,1366.91 1643.34,1384 2076,1384 v1(2105,1355) ; C22.1@1670,2190 1670,2157.7 1673.62,2154.08 1673.62,2023.62 v1(1687.24,2000) ; C26.1@2040,2180 2027.95,2167.95 2027.95,2042.05 2060,2000 ; U3.29@2106.69,1255.63 2106.69,1353.31 v1(2105,1355) ; 2146.06,2035.69 U3.78@2146.06,2084.37 ; v1@2203,1380 v1@2210,1387 ; U3.34@2205.12,1255.63 2205.12,1289.88 2140,1355 v1(2105,1355) ; v1(2210,1380) 2208.91,1378.91 2242.63,1345.2 2425.2,1345.2 C27.1@2430,1350 ; 2210,1480 2212.99,1482.99 C28.1@2420,1482.99 ; v1(2255,1940) 2255,1965 2265.12,1975.12 U3.70@2314.37,1975.12 ; v4(2610,2770) 2680,2770
  Top Layer w15: v1(1687.24,2000) 1693.49,1993.75 2053.75,1993.75 2060,2000 2061.25,1998.75 2075.06,1998.75 2078.06,1995.75 2103.94,1995.75 2106.94,1998.75 2109.12,1998.75 2146.06,2035.69 ; v1@2210,1387 2210,1480 2210,1895 v1(2255,1940)
  Top Layer w20: v1(2220,2310) 2680,2770 L2.1@2950,3040 3030,3120 3030,3160 ; U5.4@3030,3494.17 U5.2@3030,3265.83 3030,3160 ; C31.1@3130,3040 3140,3050 3030,3160
  Bottom Layer w10: v1(2105,1355) 2130,1380 v1(2210,1380) ; v4(2610,2770) pad.0@2920,2770
  Bottom Layer w15: v1(1580,1880) 1687.24,1987.24 v1(1687.24,2000) ; v3(2150,2010) 2188.75,1971.25 2202.94,1971.25 2234.19,1940 v1(2255,1940)
  Bottom Layer w20: v3(2150,2010) 2150,2277.73 2182.27,2310 v1(2220,2310)
2V5: C61.1 L1.1 pad.0@3040,2770 U6.5 | length 1190.3
  Top Layer w10: v1(2510,2840) 2510,2951.97 2550.03,2992 2602,2992 C61.1@2650,3040 C61.1@2650,3042 ; U6.5@2577.4,3282.76 2650,3210.16 C61.1@2650,3042 ; L1.1@2720,3042 C61.1@2650,3042
  Bottom Layer w10: v1(2510,2840) 2970,2840 pad.0@3040,2770
3V3: C3.1 C5.1 C12.1 C14.1 C33.1 C34.1 C35.1 C56.2 C62.1 D10.K D11.K D12.K D13.K P2.1 P8.4 P11.4 P12.2 pad.0@3160,2770 R1.2 R8.2 R9.2 R10.2 R11.2 R31.2 R32.1 R33.1 R41.1 R42.1 R51.2 R58.1 R59.1 R60.1 U1.2 U2.2 U3.17 U3.26 U3.40 U3.47 U3.56 U3.62 U3.81 U3.93 U3.94 U3.97 U3.117 U3.122 U3.130 U3.139 U4.3 U4.7 U4.8 U5.3 U8.6 U8.14 U8.24 U8.34 U8.42 U8.44 U9.4 U10.4 U11.16 U12.8 X1.4 | length 25170
  Top Layer w10: P2.1@570,2770 580,2760 U11.16@800,2760 ; U9.4@797.95,3720 797.95,3737.95 825,3765 1025,3765 1085,3705 C14.1@1085,3230 v1(1085,3120) ; U4.3@855.51,835 905,835 ; v1(950,1380) R31.2@990,1340 ; v1(1015,2625) 1095,2625 R42.1@1100,2620 R41.1@1100,2530 1100,2500 1165,2435 C5.1@1180,2435 1210.51,2404.49 U12.8@1343,2406.49 ; R59.1@1070,590 R60.1@980,590 980,565 970,555 863.03,555 816.25,601.78 816.25,646.91 818,648.66 818,685.43 852.57,720 855.68,720 910.82,775.14 910.82,829.18 905,835 ; v1(1080,1165) 1028.03,1165 950,1243.03 950,1300 985,1335 R31.2@990,1335 R31.2@990,1340 ; U2.2@1099.61,1438.31 1058.31,1438.31 990,1370 R31.2@990,1340 ; v1(1125,915) 1120,915 1100,935 U4.8@1065,935 ; D12.K@1210,817.5 1210,860 v1(1265,915) ; v1(1265,1135) 1214.34,1135 1111.25,1031.91 1111.25,981.25 U4.8@1065,935 ; D13.K@1340,817.5 1340,895 v1(1360,915) ; D10.K@1470,817.5 1470,900 v1(1485,915) ; U3.139@1485.63,1423.94 1558.94,1423.94 1660,1525 v1(1660,1710) ; U3.130@1485.63,1601.1 1548.9,1601.1 v1(1550,1600) ; U3.122@1485.63,1758.58 1549.24,1758.58 1578.75,1788.09 1578.75,1811.91 1555,1835.66 v1(1555,1845) 1542.99,1857.01 U3.117@1485.63,1857.01 ; D11.K@1600,817.5 1600,895 v1(1620,915) ; v1(1715,915) 1715,995 R32.1@1720,1000 1807.5,912.5 1807.5,884.34 1824.34,867.5 2143.41,867.5 2175,867.5 ; U3.97@1772.05,2084.37 U3.97@1772.05,2114.21 ; U3.97@1772.05,2085.35 1772.05,2125.22 1779.61,2132.79 1804.79,2132.79 v1(1820,2148) ; v1(1830,1355) 1870.47,1314.53 U3.17@1870.47,1255.63 ; U3.94@1831.1,2084.37 1831.1,2108.32 1850.79,2128 ; U3.93@1850.79,2084.37 1850.79,2128 ; C35.1@1850.79,2180 1850.79,2171.97 1850.79,2128 ; 1870.47,1310.47 1905,1345 2010,1345 2047.64,1307.36 U3.26@2047.64,1255.63 ; U3.81@2087.01,2084.37 2087.01,2123.99 2088.02,2125 ; R8.2@2150,260 2154.76,264.76 2670,264.76 R9.2@2670,260 2674.76,264.76 3180,264.76 R10.2@3180,260 3184.76,264.76 3700,264.76 R11.2@3700,260 3715,260 3760,305 3760,411.94 3297.94,874 3246,874 R58.1@3190,930 v1(3250,930) ; R33.1@2170,1000 2237.48,1000 X1.4@2266.69,970.79 2260.79,970.79 2175,885 2175,867.5 ; v1(2245,1410) 2270.43,1384.57 U3.40@2314.37,1384.57 ; C3.1@2270,790 2235,790 2175,850 2175,867.5 ; U3.47@2314.37,1522.36 2252.36,1522.36 v1(2245,1515) 2235,1525 2235,1715 ; U3.56@2314.37,1699.53 2250.47,1699.53 2235,1715 ; C33.1@2430,1830 2417.64,1817.64 2252.64,1817.64 2235,1800 2235,1715 ; U1.2@3000.39,2006.69 3001.09,2006 v1(3063,2006) 3063,1197 v1(3170,1090) ; 905,835 955,885 U4.7@1044.49,885 U4.8@1044.49,935 U4.8@1065,935
  Top Layer w12: U8.14@1667.56,2954.49 1801.83,2954.49 1890,3042.66 ; U8.24@1764.02,2637.56 1764.02,2684.02 1790,2710 1937,2710 1981.5,2754.5 ; v1(1820,2148) 1826.81,2148 C35.1@1850.79,2171.97 ; U8.6@1890,3082.44 1890,3042.66 ; U8.44@2086.62,3017.48 U8.44@2112.44,3017.48 ; 2088.02,2125 2100,2136.98 C34.1@2100,2180 2109,2189 2127.84,2189 2149,2210.16 2149,2267.87 2112.44,2304.43 U8.34@2112.44,2702.52 2033.48,2702.52 1982.66,2753.34 1982.66,2950 ; U8.42@2107.95,2950 1982.66,2950 ; 1890,3042.66 1982.66,2950
  Top Layer w15: U8.44@2084.5,3017.48 U8.44@2086.62,3017.48 ; U8.42@2112.44,2954.49 2112.93,2954 2165,2954 2176,2965 2176,2991 2149.52,3017.48 ; U8.44@2112.44,3017.48 2149.52,3017.48 ; C56.2@2580,3040 2557.48,3017.48 2149.52,3017.48 ; v1(3145,2075) 3100,2120 R1.2@3100,2130 3140,2170 3140,2235 3315,2410 3315,2820 ; pad.0@3160,2770 3265,2770 3315,2820 ; C12.1@3220,3040 3315,2945 3315,2820
  Top Layer w20: P12.2@250,3250 277,3223 337,3223 R51.2@370,3190 440,3120 v1(465,3120) ; C56.2@2570,3042 v3(2570,3120) ; U5.3@3110.55,3255.83 3110.55,3199.45 3220,3090 C12.1@3220,3040 ; v3(3190,3120) 3609.47,3120 3676.93,3187.46 U10.4@3676.93,3251.97 3676.93,3306.52 3563.45,3420 3397.01,3420 C62.1@3270,3547.01
  Bottom Layer w10: P8.4@270,1490 335,1425 905,1425 v1(950,1380) ; P2.1@570,2770 715,2625 v1(1015,2625) ; v1(1080,1165) 1235,1165 v1(1265,1135) ; v1(3170,1090) 3170,1010 v1(3250,930)
  Bottom Layer w12: v1(1125,915) v1(1265,915) v1(1360,915) 1360.75,914.25 1484.25,914.25 v1(1485,915) v1(1620,915) v1(1715,915) ; v1(1550,1600) v1(1660,1710) ; v1(1555,1845) 1660,1845 ; v1(2100,2144) 1822.81,2144 1840,2126.81 1840,2025 1660,1845 ; v1(2245,1515) v1(2245,1410) 1885,1410 v1(1830,1355) 1660,1525 v1(1660,1710) ; v1(1660,1710) 1660,1845
  Bottom Layer w15: v1(3063,2006) 3076,2006 v1(3145,2075)
  Bottom Layer w20: P8.4@270,1490 345,1565 345,1875 313.75,1906.25 311.02,1906.25 291.25,1926.02 291.25,1953.98 345,2007.73 345,2545 ; P11.4@270,2500 300,2500 345,2545 ; v3(3190,3120) v3(2570,3120) 2413.29,3120 2375.61,3157.69 2344.39,3157.69 2306.71,3120 v1(1085,3120) v1(465,3120) 465,2875 P2.1@570,2770 345,2545
5V0_IN: D3.A D4.A P5.2 P5.4 | length 2209.7
  Top Layer w20: D3.A@2049,3382 D4.A@2139,3382 2151,3370 2320,3370 2360,3330 v3(2360,3120) ; v1(3500,3070) 3500,3055 3685,2870 3730,2870 P5.2@3790,2810 P5.4@3790,2710
  Bottom Layer w20: v3(2360,3120) 2410,3070 v1(3500,3070)
5V0_USB: D1.A D2.A J6.1 U8.7 | length 804.8
  Top Layer w15: J6.1@1475.87,3594.2 1475.87,3555.13 D1.A@1649,3382 D2.A@1739,3382 1750,3393 1728,3393 1741,3380 v1(1790,3380) ; v1(1840,3160) 1858.5,3141.5 U8.7@1858.5,3082.44
  Bottom Layer w15: v1(1790,3380) 1790,3210 v1(1840,3160)
FPGA_CLK: C4.1 pad.0@2560,890 U3.23 X1.3 | length 930.3
  Top Layer w10: U3.23@1988.58,1255.63 1988.58,1219.42 2096,1112 2199.97,1112 2242.76,1069.21 X1.3@2266.69,1069.21 2310,1025.91 ; C4.1@2270,860 2270,866.41 2276.41,866.41 2310,900 2310,1025.91 ; v1(2350,1020) 2315.91,1020 2310,1025.91
  Bottom Layer w10: v1(2350,1020) 2430,1020 pad.0@2560,890
FPGA_MISO: U3.85 U11.2 | length 1760.1
  Top Layer w10: U11.2@1020,2810 967.96,2810 939,2781.04 939,2417.67 1024.67,2332 1924.64,2332 1924.82,2332.18 2008,2249 2008,2129.35 2008.27,2129.08 U3.85@2008.27,2084.37
FPGA_MOSI: U3.86 U11.14 | length 1820.9
  Top Layer w10: U11.14@800,2860 800,2854 843.4,2854 918,2779.4 918,2412.46 1016.46,2314 1917,2314 1918,2313 1988.58,2242.42 U3.86@1988.58,2084.37
FPGA_RX: P10.1 U3.99 U8.21 | length 935.3
  Top Layer w10: P10.1@1480,2520 1500,2520 1540,2560 1540,2650 1624.02,2734.02 U8.21@1667.56,2734.02 ; U3.99@1732.68,2084.37 1732.68,2136.76 1758,2162.09 1758,2192.34 1768.75,2203.09 1768.75,2242.08 v1(1770.5,2243.84)
  Bottom Layer w10: P10.1@1480,2520 1480,2475 1711.16,2243.84 v1(1770.5,2243.84)
FPGA_SCK: U3.83 U11.11 | length 2794.7
  Top Layer w10: v1(725,3035) 775,3035 U11.11@800,3010 ; v1(1210,2995) 1125,2910 1125,2775 1080,2730 985,2730 957,2702 957,2425.12 1031.94,2350.18 1917.36,2350.18 1919.43,2352.25 1930.2,2352.25 1932.28,2350.18 1989.82,2350.18 2073,2267 2123,2267 2130,2260 2130,2218.03 2119.97,2208 2078,2208 2067,2197 2067,2160.03 2047.64,2140.67 U3.83@2047.64,2084.37
  Bottom Layer w10: v1(725,3035) 1135,3035 1175,2995 v1(1210,2995)
FPGA_SCL: P5.28 P7.2 R42.2 U3.100 U8.18 U12.6 | length 5101.7
  Top Layer w10: U12.6@1443,2406.49 1444.39,2427.61 1385,2487 1335.89,2487 1328.68,2479.8 1327.68,2479.8 1320.89,2473 1175.03,2473 1140,2508.03 1140,2590 1170,2620 R42.2@1180,2620 P7.2@1280,2620 1310,2620 1465,2775 1555.51,2775 1610.51,2830 1666.06,2830 U8.18@1667.56,2828.5 ; U3.100@1712.99,2084.37 1712.99,2142.54 1740,2169.54 v1(1740,2215) ; v1(2433,2444.5) 2679.24,2690.74 2797.76,2690.74 3032,2456.5 3032,2112 3117,2027 3117,1712.74 3141.74,1688 v1(3218,1688) ; v1(3531,1780) 3532.16,1780 3648.47,1663.69 3648.47,1592.8 3672.8,1568.47 3742.53,1568.47 3790,1521 P5.28@3790,1510
  Bottom Layer w10: P7.2@1280,2620 1280,2610 1673.25,2216.75 1738.25,2216.75 v1(1740,2215) 1989,2215 2218.5,2444.5 v1(2433,2444.5) ; v1(3218,1688) 3437.84,1688 3529.84,1780 v1(3531,1780)
FPGA_SDA: P5.27 P7.1 R41.2 U3.101 U8.19 U12.5 | length 4782.4
  Top Layer w10: R41.2@1180,2530 1270,2530 P7.1@1280,2520 ; U12.5@1493,2406.49 1494.38,2429.62 1451,2473 1433,2473 1386,2520 P7.1@1280,2520 ; U8.19@1667.56,2797.01 1602.98,2797.01 1562.97,2757 1482,2757 1340,2615 1340,2580 P7.1@1280,2520 ; U3.101@1693.31,2084.37 1693.31,2148.31 1711,2166 v1(1711,2188) ; v1(2433,2395) 2516.5,2478.5 2516.5,2501.5 2687,2672 2790,2672 3014,2448 3014,2104.54 3097,2021.54 3097,1707.28 3155.78,1648.5 v1(3218,1648.5) ; v1(3531,1740.5) 3630.47,1641.03 3630.47,1585.34 3665.34,1550.47 3690,1550.47 P5.27@3690,1510
  Bottom Layer w10: P7.1@1280,2520 1310,2520 1643,2187 1727.35,2187 1728.09,2186.25 1751.91,2186.25 1752.66,2187 2026.75,2187 2172.75,2333 2177,2333 2248,2404 2424,2404 v1(2433,2395) ; v1(3218,1648.5) 3439,1648.5 v1(3531,1740.5)
FPGA_SS: U3.87 U11.5 | length 3554.2
  Top Layer w10: U11.5@1020,2960 861.94,2960 837.94,2936 837.94,2934 744.63,2934 736.63,2942 735.22,2942 665,3012.22 665,3336.59 738,3409.59 738,3475.74 706.74,3507 684.67,3507 625,3447.33 625,2938.89 727.89,2836 835.94,2836 900,2771.94 900,2405 1009,2296 1909.54,2296 1968.9,2236.64 U3.87@1968.9,2084.37
FPGA_TX: P10.2 U3.98 U8.20 | length 961.6
  Top Layer w10: P10.2@1480,2620 1625.51,2765.51 U8.20@1667.56,2765.51 ; U3.98@1752.36,2084.37 1752.36,2131 1810,2188.63 v1(1810,2245)
  Bottom Layer w10: P10.2@1480,2620 1510,2620 1530,2600 1530,2525 v1(1810,2245)
FPGAIO_A2: R30.1 U3.39 | length 526.8
  Top Layer w10: U3.39@2314.37,1364.88 2397.91,1364.88 2410.03,1377 2504.97,1377 2590,1291.97 2590,1190 2660,1120 R30.1@2670,1120
FPGAIO_A3: R29.1 U3.42 | length 487.7
  Top Layer w10: U3.42@2314.37,1423.94 2388.15,1423.94 2396.09,1416 2504,1416 2610,1310 2610,1250 R29.1@2670,1190
FPGAIO_A4: R28.1 U3.43 | length 440.7
  Top Layer w10: U3.43@2314.37,1443.62 2393.92,1443.62 2402.55,1435 2510.46,1435 2628,1317.46 2628,1302 R28.1@2670,1260
FPGAIO_A5: R27.1 U3.44 | length 410.8
  Top Layer w10: U3.44@2314.37,1463.31 2399.69,1463.31 2410,1453 2547,1453 R27.1@2670,1330
FPGAIO_A6: R26.1 U3.46 | length 408.4
  Top Layer w10: U3.46@2314.37,1502.68 2380.71,1502.68 2393.03,1515 2555,1515 R26.1@2670,1400
FPGAIO_A7: R25.1 U3.49 | length 393.6
  Top Layer w10: U3.49@2314.37,1561.73 2578.27,1561.73 R25.1@2670,1470
FPGAIO_A8: R24.1 U3.50 | length 372.8
  Top Layer w10: U3.50@2314.37,1581.42 2628.58,1581.42 R24.1@2670,1540
FPGAIO_A9: R23.1 U3.51 | length 359.3
  Top Layer w10: U3.51@2314.37,1601.1 2661.1,1601.1 R23.1@2670,1610
FPGAIO_A10: R22.1 U3.58 | length 380
  Top Layer w10: U3.58@2314.37,1738.9 2611.1,1738.9 R22.1@2670,1680
FPGAIO_A11: R21.1 U3.59 | length 359.2
  Top Layer w10: U3.59@2314.37,1758.58 2661.42,1758.58 R21.1@2670,1750
FPGAIO_A12: R20.1 U3.60 | length 372.9
  Top Layer w10: U3.60@2314.37,1778.27 2628.27,1778.27 R20.1@2670,1820
FPGAIO_A13: R19.1 U3.61 | length 393.8
  Top Layer w10: U3.61@2314.37,1797.95 2577.95,1797.95 R19.1@2670,1890
FPGAIO_A14: R18.1 U3.64 | length 398.3
  Top Layer w10: U3.64@2314.37,1857.01 2567.01,1857.01 R18.1@2670,1960
FPGAIO_A15: R17.1 U3.65 | length 419.1
  Top Layer w10: U3.65@2314.37,1876.69 2516.69,1876.69 R17.1@2670,2030
FPGAIO_A16: R16.1 U3.66 | length 440
  Top Layer w10: U3.66@2314.37,1896.38 2466.38,1896.38 R16.1@2670,2100
FPGAIO_A17: R15.1 U3.67 | length 460.8
  Top Layer w10: U3.67@2314.37,1916.06 2416.06,1916.06 R15.1@2670,2170
FPGAIO_A18: R14.1 U3.68 | length 488.7
  Top Layer w10: U3.68@2314.37,1935.75 2357.63,1935.75 2661.88,2240 R14.1@2670,2240 R14.1@2665,2235
FPGAIO_A19: R39.1 U3.69 | length 523.8
  Top Layer w10: U3.69@2314.37,1955.43 2351.86,1955.43 2461.46,2065.03 2461.46,2101.46 R39.1@2670,2310
FPGAIO_A20: R38.1 U3.71 | length 562.6
  Top Layer w10: U3.71@2314.37,1994.8 2365.77,1994.8 2443.46,2072.49 2443.46,2153.46 R38.1@2670,2380
FPGAIO_A21: R37.1 U3.72 | length 609.5
  Top Layer w10: U3.72@2314.37,2014.49 2360,2014.49 2425.46,2079.94 2425.46,2205.46 R37.1@2670,2450
FPGAIO_A22: R5.1 U3.76 | length 726.9
  Top Layer w10: U3.76@2185.43,2084.37 2185.43,2189.98 2287.46,2292 2442,2292 R5.1@2670,2520
FPGAIO_A23: R2.1 U3.77 | length 778.9
  Top Layer w10: U3.77@2165.75,2084.37 2165.75,2195.75 2280,2310 2390,2310 R2.1@2670,2590
FPGAIO_A24: R35.1 U3.32 | length 643
  Top Layer w10: U3.32@2165.75,1255.63 2165.75,1213.71 2190.25,1189.21 2460.79,1189.21 R35.1@2670,980
FPGAIO_A25: R36.1 U3.33 | length 590.9
  Top Layer w10: U3.33@2185.43,1255.63 2185.43,1220.12 2187.21,1218.34 2187.21,1217.7 2197.7,1207.21 2512.79,1207.21 R36.1@2670,1050
FPGAIO_B0: U2.3 U3.142 | length 424.7
  Top Layer w10: U2.3@1099.61,1457.99 1132.17,1457.99 1132.25,1458.08 1206.08,1458.08 1299.28,1364.88 U3.142@1485.63,1364.88
FPGAIO_B1: U2.4 U3.141 | length 424.6
  Top Layer w10: U2.4@1099.61,1477.68 1214.32,1477.68 1307.43,1384.57 U3.141@1485.63,1384.57
FPGAIO_B2: U2.5 U3.137 | length 400.1
  Top Layer w10: U2.5@1099.61,1497.36 1137.21,1497.36 1362.18,1497.36 1396.24,1463.31 U3.137@1485.63,1463.31
FPGAIO_B3: U2.6 U3.136 | length 400.1
  Top Layer w10: U2.6@1099.61,1517.05 1367.95,1517.05 1402.01,1482.99 U3.136@1485.63,1482.99
FPGAIO_B4: U2.7 U3.135 | length 400.1
  Top Layer w10: U2.7@1099.61,1536.73 1137.21,1536.73 1373.72,1536.73 1407.78,1502.68 U3.135@1485.63,1502.68
FPGAIO_B5: U2.8 U3.134 | length 400.1
  Top Layer w10: U2.8@1099.61,1556.42 1379.49,1556.42 1413.55,1522.36 U3.134@1485.63,1522.36
FPGAIO_B6: U2.9 U3.133 | length 400.1
  Top Layer w10: U2.9@1099.61,1576.1 1132.17,1576.1 1385.27,1576.1 1419.32,1542.05 U3.133@1485.63,1542.05
FPGAIO_B7: U2.10 U3.132 | length 400.1
  Top Layer w10: U2.10@1099.61,1595.79 1391.04,1595.79 1425.09,1561.73 U3.132@1485.63,1561.73
FPGAIO_B8: U2.11 U3.125 | length 420.8
  Top Layer w10: U2.11@1099.61,1615.47 1361.83,1615.47 1445.88,1699.53 U3.125@1485.63,1699.53
FPGAIO_B9: U2.12 U3.121 | length 445.3
  Top Layer w10: U2.12@1099.61,1635.16 1195.15,1635.16 1338.26,1778.27 U3.121@1485.63,1778.27
FPGAIO_B10: U2.13 U3.120 | length 445.3
  Top Layer w10: U2.13@1099.61,1654.84 1189.38,1654.84 1332.49,1797.95 U3.120@1485.63,1797.95
FPGAIO_B11: U2.14 U3.119 | length 445.3
  Top Layer w10: U2.14@1099.61,1674.53 1183.61,1674.53 1325.08,1816 1483.99,1816 U3.119@1485.63,1817.64
FPGAIO_B12: U2.15 U3.115 | length 490.8
  Top Layer w10: U2.15@1099.61,1694.21 1146.79,1694.21 1147,1694 1177.62,1694 1308,1824.38 1308,1859.97 1344.41,1896.38 U3.115@1485.63,1896.38
FPGAIO_B13: U2.16 U3.114 | length 490.8
  Top Layer w10: U2.16@1099.61,1713.9 1146.79,1713.9 1147,1713.68 1171.85,1713.68 1290,1831.83 1290,1867.43 1338.64,1916.06 U3.114@1485.63,1916.06
FPGAIO_B14: U2.17 U3.113 | length 490.8
  Top Layer w10: U2.17@1099.61,1733.58 1146.79,1733.58 1147,1733.37 1166.08,1733.37 1272,1839.29 1272,1874.88 1331.18,1934.06 1378.31,1934.06 1380,1935.75 U3.113@1485.63,1935.75
FPGAIO_B15: U2.18 U3.112 | length 490.8
  Top Layer w10: U2.18@1099.61,1753.27 1146.79,1753.27 1147,1753.05 1160.31,1753.05 1254,1846.75 1254,1882.34 1327.09,1955.43 U3.112@1485.63,1955.43
FPGAIO_B16: U2.19 U3.111 | length 490.8
  Top Layer w10: U2.19@1099.61,1772.95 1146.79,1772.95 1147,1772.74 1154.54,1772.74 1236,1854.2 1236,1889.79 1319.64,1973.43 1378.31,1973.43 1380,1975.12 U3.111@1485.63,1975.12
FPGAIO_B17: U2.20 U3.110 | length 490.8
  Top Layer w10: U2.20@1099.61,1792.64 1132.17,1792.64 1132.38,1792.42 1148.77,1792.42 1218,1861.66 1218,1897.25 1315.55,1994.8 U3.110@1485.63,1994.8